# Altium PCB Lab1_Lyaptsev_pcb.pcbdoc
Units mm, origin at the board's own origin, x right, y up, seen from the top; angles counter-clockwise.
Board outline 56 x 17 mm, 4 copper layers (Top Layer, Signal Layer 1, Signal Layer 2, Bottom Layer), stack 1.522 mm thick; 24 components, 26 nets, 80 pads, 140 vias.
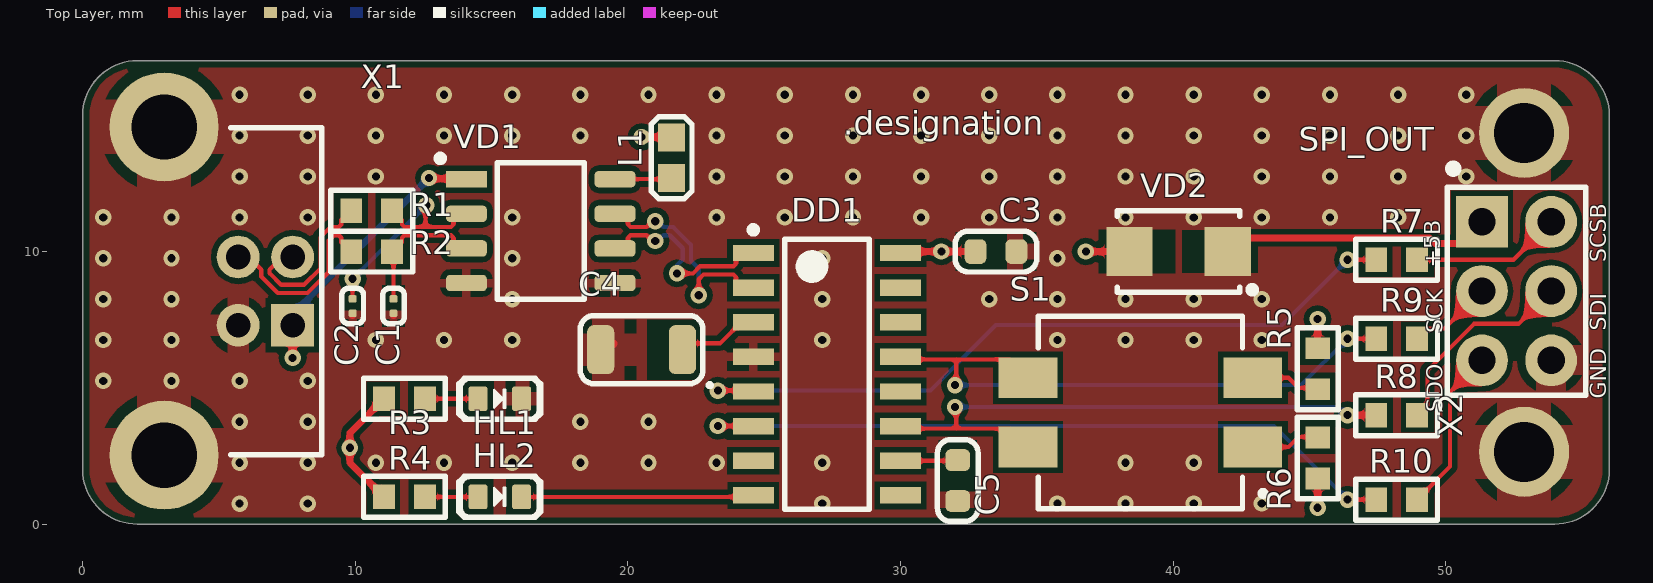
[diagram p0: Top Layer view]
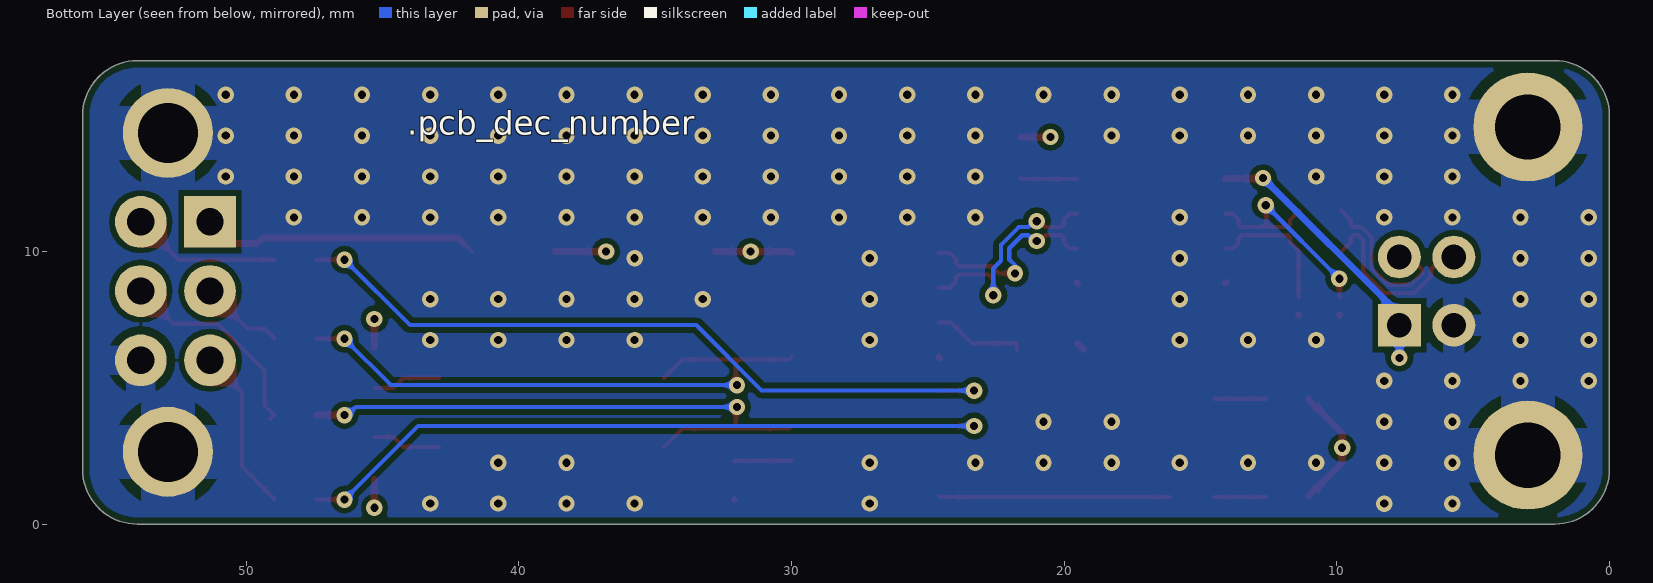
[diagram p1: Bottom Layer view, seen from below]
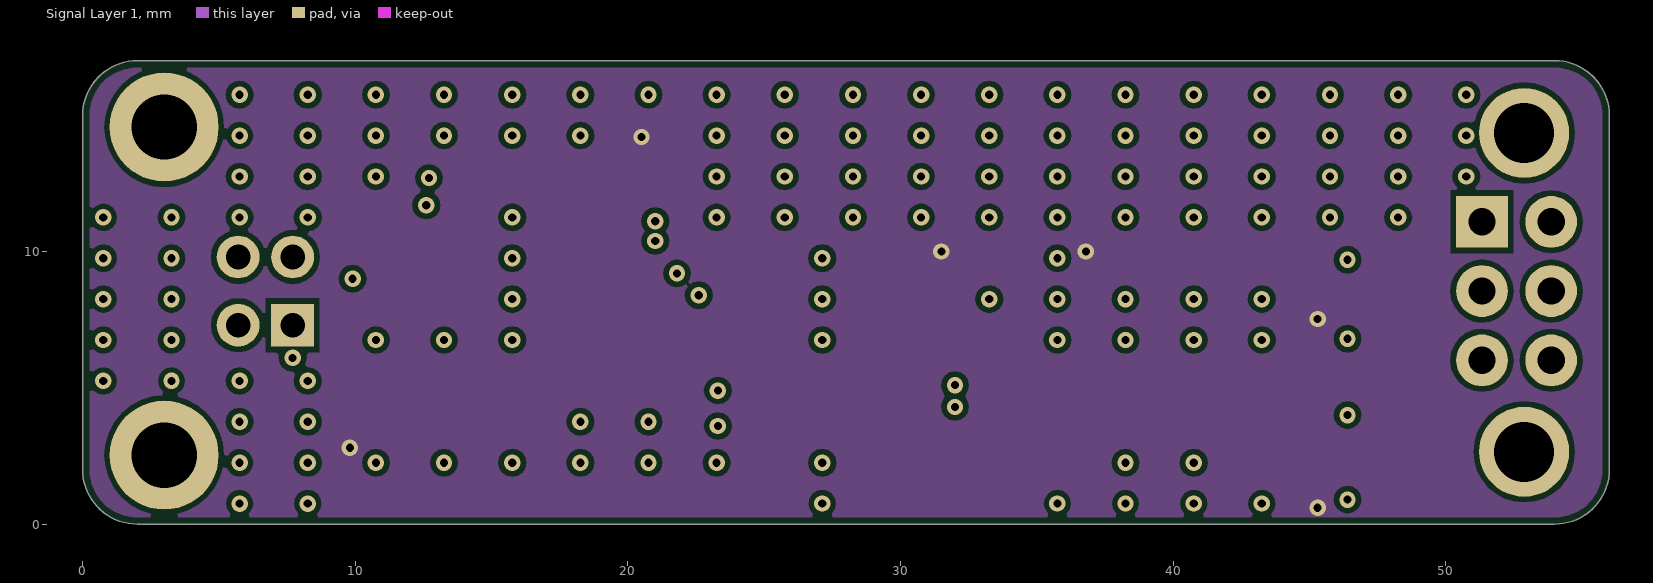
[diagram p2: Signal Layer 1]
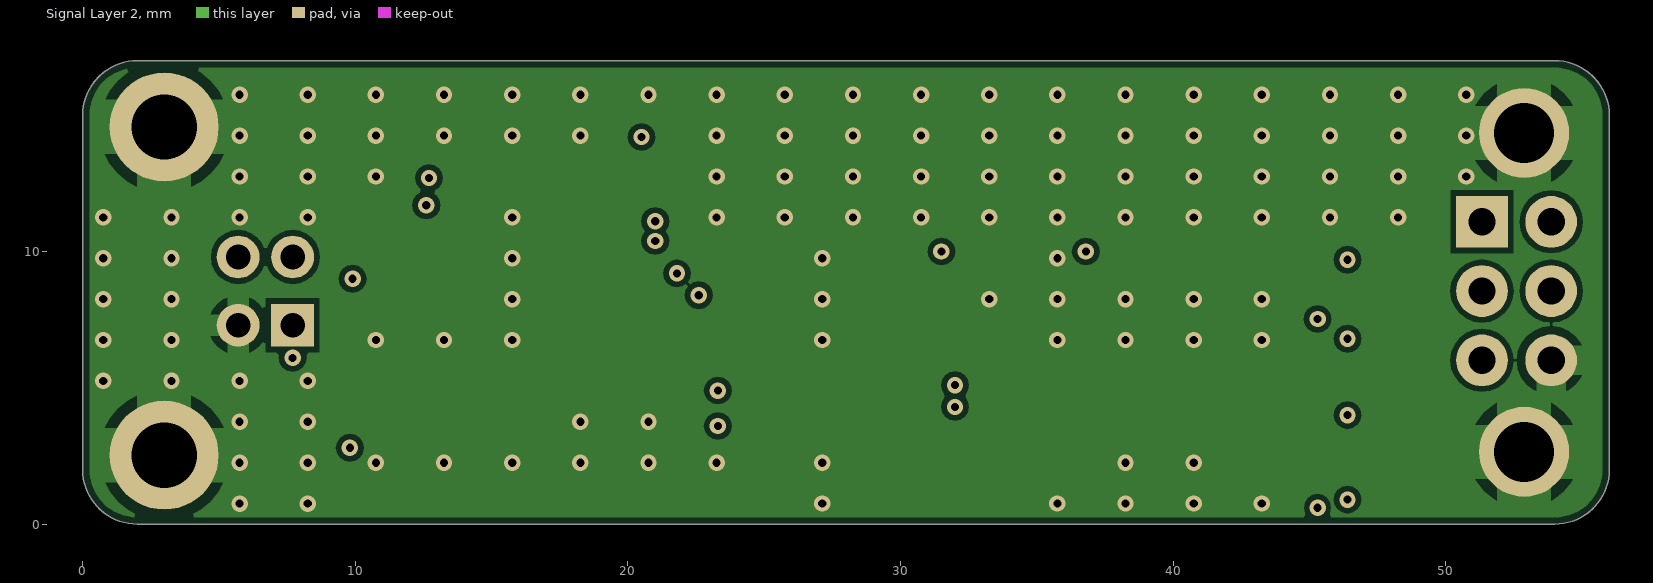
[diagram p3: Signal Layer 2]

## Layer stack, top to bottom
Top Solder: solder mask 0.0102, Solder Resist, Dk 3.5
Top Layer: signal copper 0.018
Prepreg 1: prepreg 0.125, FR4 HiTg170, Dk 5.07
Signal Layer 1: signal copper 0.018
Core 1: core 1.2, FR4, Dk 4.6
Signal Layer 2: signal copper 0.018
Prepreg 2: prepreg 0.125, FR4 HiTg170, Dk 5.07
Bottom Layer: signal copper 0.018
Bottom Solder: solder mask 0.0102, Solder Resist, Dk 3.5

## Board outline
0,2 0,15 cw(c2,15) 2,17 54,17 cw(c54,15) 56,15 56,2 cw(c54,2) 54,0 2,0 cw(c2,2)

## Design rules (kind name [scope] priority, off if disabled: settings)
AcuteAngle min_acute_angle [OnCopper] p1: minimum=3.50000000000000E+0001 checktracksonly=FALSE // Минимальный угол между примитивами топологии
BoardOutlineClearance board_outline_clearance_std [NOT (OnLayer('Bottom Overlay') OR OnLayer('Top Overlay'))] p1: gap=0.25 ignorepadtopadclearanceinfootprint=FALSE except(0: Arc-SplitContinuation Track-SplitContinuation SMDPad-SplitContinuation THPad-SplitContinuation Via-SplitContinuation Fill-SplitContinuation Poly-SplitContinuation Region-SplitContinuation Text-SplitContinuation) // Отступ элементов топологии от края фрезеруемой печатной платы
Clearance clearance_outer_18um_std [OnTopLayer OR OnBottomLayer] p1: gap=0.125 ignorepadtopadclearanceinfootprint=TRUE except(0.2: Arc-Fill Arc-Poly Track-Fill Track-Poly SMDPad-SMDPad SMDPad-Fill SMDPad-Poly THPad-Fill THPad-Poly Via-Fill Via-Poly Fill-Fill Fill-Poly Poly-Poly Poly-Region Poly-Text; 0.25: Arc-Hole Track-Hole SMDPad-Hole THPad-Hole Via-Hole Fill-Hole Poly-Hole Region-Hole Text-Hole) // Зазоры на внешних слоях
Clearance clearance_inner_18um_std [NOT (OnTopLayer Or OnBottomLayer)] p2: gap=0.125 ignorepadtopadclearanceinfootprint=FALSE except(0.2: Arc-Fill Arc-Poly Track-Fill Track-Poly SMDPad-SMDPad SMDPad-Fill SMDPad-Poly THPad-Fill THPad-Poly Via-Fill Via-Poly Fill-Fill Fill-Poly Poly-Poly Poly-Region Poly-Text; 0.25: Arc-Hole Track-Hole SMDPad-Hole THPad-Hole Via-Hole Fill-Hole Poly-Hole Region-Hole Text-Hole) // Зазоры на внутренних слоях
ComponentClearance [All] p1: gap=0 collisioncheckmode=3 verticalgap=0 showdistances=FALSE
DiffPairsRouting "Schematic Differential Pairs Routing_4" [InNet('CN_D_WITHR_P')] p1: maxlimit=0.254 minlimit=0.15 mostfreqgap=0.254 toplayer_maxgap=0.15 toplayer_prefgap=0.15 toplayer_minwidth=0.155 toplayer_maxwidth=0.155 toplayer_prefwidth=0.155 bottomlayer_maxgap=0.15 bottomlayer_prefgap=0.15 bottomlayer_minwidth=0.155 bottomlayer_maxwidth=0.155 bottomlayer_prefwidth=0.155 impedanceprofiledriven=TRUE impedanceprofileid={1B1F1868-2FFB-4D51-908A-913D90CA9AFC} impedanceprofilevalue=95.000000 maxuncoupledlength=12.7
DiffPairsRouting "Schematic Differential Pairs Routing_3" [InNet('CN_D_WITHR_N')] p2: maxlimit=0.254 minlimit=0.15 mostfreqgap=0.254 toplayer_maxgap=0.15 toplayer_prefgap=0.15 toplayer_minwidth=0.155 toplayer_maxwidth=0.155 toplayer_prefwidth=0.155 bottomlayer_maxgap=0.15 bottomlayer_prefgap=0.15 bottomlayer_minwidth=0.155 bottomlayer_maxwidth=0.155 bottomlayer_prefwidth=0.155 impedanceprofiledriven=TRUE impedanceprofileid={1B1F1868-2FFB-4D51-908A-913D90CA9AFC} impedanceprofilevalue=95.000000 maxuncoupledlength=12.7
DiffPairsRouting "Schematic Differential Pairs Routing_5" [InNet('CN_D_N')] p3: maxlimit=0.254 minlimit=0.15 mostfreqgap=0.254 toplayer_maxgap=0.15 toplayer_prefgap=0.15 toplayer_minwidth=0.155 toplayer_maxwidth=0.155 toplayer_prefwidth=0.155 bottomlayer_maxgap=0.15 bottomlayer_prefgap=0.15 bottomlayer_minwidth=0.155 bottomlayer_maxwidth=0.155 bottomlayer_prefwidth=0.155 impedanceprofiledriven=TRUE impedanceprofileid={1B1F1868-2FFB-4D51-908A-913D90CA9AFC} impedanceprofilevalue=95.000000 maxuncoupledlength=12.7
DiffPairsRouting "Schematic Differential Pairs Routing_2" [InNet('CN_D_P')] p4: maxlimit=0.254 minlimit=0.15 mostfreqgap=0.254 toplayer_maxgap=0.15 toplayer_prefgap=0.15 toplayer_minwidth=0.155 toplayer_maxwidth=0.155 toplayer_prefwidth=0.155 bottomlayer_maxgap=0.15 bottomlayer_prefgap=0.15 bottomlayer_minwidth=0.155 bottomlayer_maxwidth=0.155 bottomlayer_prefwidth=0.155 impedanceprofiledriven=TRUE impedanceprofileid={1B1F1868-2FFB-4D51-908A-913D90CA9AFC} impedanceprofilevalue=95.000000 maxuncoupledlength=12.7
DiffPairsRouting "Schematic Differential Pairs Routing_1" [InNet('USB_D_N')] p5: maxlimit=0.254 minlimit=0.15 mostfreqgap=0.254 toplayer_maxgap=0.15 toplayer_prefgap=0.15 toplayer_minwidth=0.155 toplayer_maxwidth=0.155 toplayer_prefwidth=0.155 bottomlayer_maxgap=0.15 bottomlayer_prefgap=0.15 bottomlayer_minwidth=0.155 bottomlayer_maxwidth=0.155 bottomlayer_prefwidth=0.155 impedanceprofiledriven=TRUE impedanceprofileid={1B1F1868-2FFB-4D51-908A-913D90CA9AFC} impedanceprofilevalue=95.000000 maxuncoupledlength=12.7
DiffPairsRouting "Schematic Differential Pairs Routing" [InNet('USB_D_P')] p6: maxlimit=0.254 minlimit=0.15 mostfreqgap=0.254 toplayer_maxgap=0.15 toplayer_prefgap=0.15 toplayer_minwidth=0.155 toplayer_maxwidth=0.155 toplayer_prefwidth=0.155 bottomlayer_maxgap=0.15 bottomlayer_prefgap=0.15 bottomlayer_minwidth=0.155 bottomlayer_maxwidth=0.155 bottomlayer_prefwidth=0.155 impedanceprofiledriven=TRUE impedanceprofileid={1B1F1868-2FFB-4D51-908A-913D90CA9AFC} impedanceprofilevalue=95.000000 maxuncoupledlength=12.7
DiffPairsRouting diff_pairs_routing [All] p7: maxlimit=0.254 minlimit=0.127 mostfreqgap=0.254 toplayer_maxgap=0.127 toplayer_prefgap=0.127 toplayer_minwidth=0.143 toplayer_maxwidth=0.143 toplayer_prefwidth=0.143 midlayer1_minwidth=0.381 midlayer1_maxwidth=0.381 midlayer1_prefwidth=0.381 midlayer2_minwidth=0.381 midlayer2_maxwidth=0.381 midlayer2_prefwidth=0.381 bottomlayer_maxgap=0.127 bottomlayer_prefgap=0.127 bottomlayer_minwidth=0.143 bottomlayer_maxwidth=0.143 bottomlayer_prefwidth=0.143 impedanceprofiledriven=TRUE impedanceprofileid={FD46899E-B5A2-4EF5-A302-5D2DB6A51F35} maxuncoupledlength=12.7 // Правила трассировки дифференциальных пар
HoleSize min_hole_size_std [IsPad] p1: absolutevalues=TRUE maxlimit=5.9 minlimit=0.6 maxpercent=80.000 minpercent=20.000 // Диаметр межслойного переходного отверстия
HoleSize min_hole_size_via_std [IsVia] p2: absolutevalues=TRUE maxlimit=5.9 minlimit=0.3 maxpercent=80.000 minpercent=20.000 // Минимальный диаметр монтажного отверстия
HoleToHoleClearance hole_to_hole_clearance_std [All] p1: gap=0.2 allowstackedmicrovias=FALSE // Минимальное расстояние между краями двух отверстий
MinimumAnnularRing min_via_ar_std [All] p1: minimumring=0.15 // Поясок площадки переходного отверстия (Annular ring VIA)
MinimumAnnularRing min_pad_ar_std [All] p2: minimumring=0.2 // Поясок монтажной контактной площадки (Annular ring PAD)
MinimumSolderMaskSliver min_solder_mask_bridge_std [All] p1: minsoldermaskwidth=0.15 // Мнимальная ширина масочного мостика
PlaneClearance plane_clearance_18um_std [All] p1: clearance=0.2 // Отступ полигона (для слоя plane) от элементов топологии
PlaneConnect [All] p1: planeconnectstyle=Relief reliefexpansion=0.5 reliefentries=4 reliefconductorwidth=0.2 reliefairgap=0.2
PolygonConnect poly_connect_to_pad<=0.3 [(AsMM(PadXSize_AllLayers)<=0.301) or (AsMM(PadYSize_AllLayers)<=0.301)] p1: thpad.connectstyle=Relief thpad.reliefconductorwidth=0.2 thpad.reliefentries=4 thpad.polygonreliefangle="90 Angle" thpad.airgapwidth=0.2 smdpad.connectstyle=Relief smdpad.reliefconductorwidth=0.2 smdpad.reliefentries=4 smdpad.polygonreliefangle="90 Angle" smdpad.airgapwidth=0.2 via.connectstyle=Direct via.reliefconductorwidth=0.254 via.reliefentries=4 via.polygonreliefangle="90 Angle" via.airgapwidth=0.254 // Правила подключения полигонов для падов от 0,3мм и меньше
PolygonConnect poly_connect_to_pad<=0.4 [(AsMM(PadXSize_AllLayers)<=0.401) or (AsMM(PadYSize_AllLayers)<=0.401)] p2: thpad.connectstyle=Relief thpad.reliefconductorwidth=0.26 thpad.reliefentries=4 thpad.polygonreliefangle="90 Angle" thpad.airgapwidth=0.2 smdpad.connectstyle=Relief smdpad.reliefconductorwidth=0.26 smdpad.reliefentries=4 smdpad.polygonreliefangle="90 Angle" smdpad.airgapwidth=0.2 via.connectstyle=Direct via.reliefconductorwidth=0.254 via.reliefentries=4 via.polygonreliefangle="90 Angle" via.airgapwidth=0.254 // Правила подключения полигонов для падов от 0,4 и меньше
PolygonConnect poly_connect_to_pad<=0.6 [(AsMM(PadXSize_AllLayers)<=0.601) or (AsMM(PadYSize_AllLayers)<=0.601)] p3: thpad.connectstyle=Relief thpad.reliefconductorwidth=0.33 thpad.reliefentries=4 thpad.polygonreliefangle="90 Angle" thpad.airgapwidth=0.2 smdpad.connectstyle=Relief smdpad.reliefconductorwidth=0.33 smdpad.reliefentries=4 smdpad.polygonreliefangle="90 Angle" smdpad.airgapwidth=0.2 via.connectstyle=Direct via.reliefconductorwidth=0.254 via.reliefentries=4 via.polygonreliefangle="90 Angle" via.airgapwidth=0.254 // Правила подключения полигонов для падов от 0,6мм и меньше
PolygonConnect poly_connect_to_pad<=0.7 [(AsMM(PadXSize_AllLayers)<=0.701) or (AsMM(PadYSize_AllLayers)<=0.701)] p4: thpad.connectstyle=Relief thpad.reliefconductorwidth=0.46 thpad.reliefentries=4 thpad.polygonreliefangle="90 Angle" thpad.airgapwidth=0.2 smdpad.connectstyle=Relief smdpad.reliefconductorwidth=0.46 smdpad.reliefentries=4 smdpad.polygonreliefangle="90 Angle" smdpad.airgapwidth=0.2 via.connectstyle=Direct via.reliefconductorwidth=0.254 via.reliefentries=4 via.polygonreliefangle="90 Angle" via.airgapwidth=0.254 // Правила подключения полигонов для падов от 0,7мм и меньше
PolygonConnect poly_connect_to_pad<=0.8 [(AsMM(PadXSize_AllLayers)<=0.8)or(AsMM(PadYSize_AllLayers)<=0.8)] p5: thpad.connectstyle=Relief thpad.reliefconductorwidth=0.53 thpad.reliefentries=4 thpad.polygonreliefangle="90 Angle" thpad.airgapwidth=0.3 smdpad.connectstyle=Relief smdpad.reliefconductorwidth=0.53 smdpad.reliefentries=4 smdpad.polygonreliefangle="90 Angle" smdpad.airgapwidth=0.2 via.connectstyle=Direct via.reliefconductorwidth=0.254 via.reliefentries=4 via.polygonreliefangle="90 Angle" via.airgapwidth=0.254 // Правила подключения полигонов для падов от 0,8мм и меньше
PolygonConnect poly_connect_to_pad<=1 [(AsMM(PadXSize_AllLayers)<=1.01)or(AsMM(PadYSize_AllLayers)<=1.01)] p6: thpad.connectstyle=Relief thpad.reliefconductorwidth=0.6 thpad.reliefentries=4 thpad.polygonreliefangle="90 Angle" thpad.airgapwidth=0.3 smdpad.connectstyle=Relief smdpad.reliefconductorwidth=0.6 smdpad.reliefentries=4 smdpad.polygonreliefangle="90 Angle" smdpad.airgapwidth=0.2 via.connectstyle=Direct via.reliefconductorwidth=0.254 via.reliefentries=4 via.polygonreliefangle="90 Angle" via.airgapwidth=0.254 // Правила подключения полигонов для падов от 1мм и меньше
PolygonConnect poly_connect_to_pad<=1.3 [(AsMM(PadXSize_AllLayers)<=1.31)or(AsMM(PadYSize_AllLayers)<=1.31)] p7: thpad.connectstyle=Relief thpad.reliefconductorwidth=0.66 thpad.reliefentries=4 thpad.polygonreliefangle="90 Angle" thpad.airgapwidth=0.3 smdpad.connectstyle=Relief smdpad.reliefconductorwidth=0.86 smdpad.reliefentries=4 smdpad.polygonreliefangle="90 Angle" smdpad.airgapwidth=0.2 via.connectstyle=Direct via.reliefconductorwidth=0.254 via.reliefentries=4 via.polygonreliefangle="90 Angle" via.airgapwidth=0.254 // Правила подключения полигонов для падов от 1,3мм и меньше
PolygonConnect poly_connect_to_pad<=1.6 [(AsMM(PadXSize_AllLayers)<=1.61)or(AsMM(PadYSize_AllLayers)<=1.61)] p8: thpad.connectstyle=Relief thpad.reliefconductorwidth=0.8 thpad.reliefentries=4 thpad.polygonreliefangle="90 Angle" thpad.airgapwidth=0.3 smdpad.connectstyle=Relief smdpad.reliefconductorwidth=1 smdpad.reliefentries=4 smdpad.polygonreliefangle="90 Angle" smdpad.airgapwidth=0.2 via.connectstyle=Direct via.reliefconductorwidth=0.254 via.reliefentries=4 via.polygonreliefangle="90 Angle" via.airgapwidth=0.254 // Правила подключения полигонов для падов от 1,6мм и меньше
PolygonConnect poly_connect_to_pad<=1.8 [(AsMM(PadXSize_AllLayers)<=1.8)or(AsMM(PadYSize_AllLayers)<=1.8)] p9: thpad.connectstyle=Relief thpad.reliefconductorwidth=1 thpad.reliefentries=4 thpad.polygonreliefangle="90 Angle" thpad.airgapwidth=0.3 smdpad.connectstyle=Relief smdpad.reliefconductorwidth=1.2 smdpad.reliefentries=4 smdpad.polygonreliefangle="90 Angle" smdpad.airgapwidth=0.2 via.connectstyle=Direct via.reliefconductorwidth=0.254 via.reliefentries=4 via.polygonreliefangle="90 Angle" via.airgapwidth=0.254 // Правила подключения полигонов для падов от 1,8мм и меньше
PolygonConnect poly_connect_to_pad<=2 [(AsMM(PadXSize_AllLayers)<=2.01)or(AsMM(PadYSize_AllLayers)<=2.01)] p10: thpad.connectstyle=Relief thpad.reliefconductorwidth=1.1 thpad.reliefentries=4 thpad.polygonreliefangle="90 Angle" thpad.airgapwidth=0.3 smdpad.connectstyle=Relief smdpad.reliefconductorwidth=1.4 smdpad.reliefentries=4 smdpad.polygonreliefangle="90 Angle" smdpad.airgapwidth=0.2 via.connectstyle=Direct via.reliefconductorwidth=0.254 via.reliefentries=4 via.polygonreliefangle="90 Angle" via.airgapwidth=0.254 // Правила подключения полигонов для падов от 2мм и меньше
PolygonConnect poly_connect_to_pad<=2.3 [(AsMM(PadXSize_AllLayers)<=2.31)or(AsMM(PadYSize_AllLayers)<=2.31)] p11: thpad.connectstyle=Relief thpad.reliefconductorwidth=1.2 thpad.reliefentries=4 thpad.polygonreliefangle="90 Angle" thpad.airgapwidth=0.3 smdpad.connectstyle=Relief smdpad.reliefconductorwidth=1.4 smdpad.reliefentries=4 smdpad.polygonreliefangle="90 Angle" smdpad.airgapwidth=0.2 via.connectstyle=Direct via.reliefconductorwidth=0.254 via.reliefentries=4 via.polygonreliefangle="90 Angle" via.airgapwidth=0.254 // Правила подключения полигонов для падов от 2,3мм и меньше
PolygonConnect poly_connect_to_pad<=2.5 [(AsMM(PadXSize_AllLayers)<=2.51)or(AsMM(PadYSize_AllLayers)<=2.51)] p12: thpad.connectstyle=Relief thpad.reliefconductorwidth=1.2 thpad.reliefentries=4 thpad.polygonreliefangle="90 Angle" thpad.airgapwidth=0.3 smdpad.connectstyle=Relief smdpad.reliefconductorwidth=1.4 smdpad.reliefentries=4 smdpad.polygonreliefangle="90 Angle" smdpad.airgapwidth=0.2 via.connectstyle=Direct via.reliefconductorwidth=0.254 via.reliefentries=4 via.polygonreliefangle="90 Angle" via.airgapwidth=0.254 // Правила подключения полигонов для падов от 2,5мм и меньше
PolygonConnect poly_connect_to_pad<=2.7 [(AsMM(PadXSize_AllLayers)<=2.71)or(AsMM(PadYSize_AllLayers)<=2.71)] p13: thpad.connectstyle=Relief thpad.reliefconductorwidth=1.4 thpad.reliefentries=4 thpad.polygonreliefangle="90 Angle" thpad.airgapwidth=0.3 smdpad.connectstyle=Relief smdpad.reliefconductorwidth=1.6 smdpad.reliefentries=4 smdpad.polygonreliefangle="90 Angle" smdpad.airgapwidth=0.2 via.connectstyle=Direct via.reliefconductorwidth=0.254 via.reliefentries=4 via.polygonreliefangle="90 Angle" via.airgapwidth=0.254 // Правила подключения полигонов для падов от 2,7мм и меньше
PolygonConnect poly_connect_to_pad<=3 [(AsMM(PadXSize_AllLayers)<=3.01)or(AsMM(PadYSize_AllLayers)<=3.01)] p14: thpad.connectstyle=Relief thpad.reliefconductorwidth=1.6 thpad.reliefentries=4 thpad.polygonreliefangle="90 Angle" thpad.airgapwidth=0.3 smdpad.connectstyle=Relief smdpad.reliefconductorwidth=1.8 smdpad.reliefentries=4 smdpad.polygonreliefangle="90 Angle" smdpad.airgapwidth=0.2 via.connectstyle=Direct via.reliefconductorwidth=0.254 via.reliefentries=4 via.polygonreliefangle="90 Angle" via.airgapwidth=0.254 // Правила подключения полигонов для падов от 3мм и меньше
PolygonConnect poly_connect_to_pad<=7 [(AsMM(PadXSize_AllLayers)<7.01)or(AsMM(PadYSize_AllLayers)<=7.01)] p15: thpad.connectstyle=Relief thpad.reliefconductorwidth=2 thpad.reliefentries=4 thpad.polygonreliefangle="90 Angle" thpad.airgapwidth=0.4 smdpad.connectstyle=Relief smdpad.reliefconductorwidth=2 smdpad.reliefentries=4 smdpad.polygonreliefangle="90 Angle" smdpad.airgapwidth=0.3 via.connectstyle=Direct via.reliefconductorwidth=0.254 via.reliefentries=4 via.polygonreliefangle="90 Angle" via.airgapwidth=0.254 // Правила подключения полигонов для падов от 7мм и меньше
PolygonConnect poly_connect_to_pad [All] p16: thpad.connectstyle=Relief thpad.reliefconductorwidth=0.25 thpad.reliefentries=4 thpad.polygonreliefangle="90 Angle" thpad.airgapwidth=0.2 smdpad.connectstyle=Relief smdpad.reliefconductorwidth=0.25 smdpad.reliefentries=4 smdpad.polygonreliefangle="90 Angle" smdpad.airgapwidth=0.2 via.connectstyle=Direct via.reliefconductorwidth=0.25 via.reliefentries=4 via.polygonreliefangle="90 Angle" via.airgapwidth=0.2 // Правила подключения полигонов общие
RoutingCorners [All] p1 off: cornerstyle=45-Degree minsetback=2.5 maxsetback=2.5
RoutingVias [All] p1: holewidth=0.3 width=0.6 viastyle="Through Hole" minholewidth=0.3 minwidth=0.6 maxholewidth=5.9 maxwidth=6.4
SilkToSilkClearance silk_to_silk_clearance_std [All] p1 off: silktosilkclearance=0.15 // Отступ текста шелкографии от других примитивов шелкографии
SilkToSolderMaskClearance silk_to_solder_mask_clearance_std [IsPad] p1 off: minsilkscreentomaskgap=0.15 clearancetoexposedcopper=FALSE // Минимальное расстояние между элементами шелкографии и вскрытой медью
SolderMaskExpansion solder_mask_expansion_std [All] p1: expansion=0.05 // Припуск паяльной масски
UnRoutedNet [All] p1: checkbadconnections=TRUE
Width width_18um_std [All] p1: maxlimit=10 minlimit=0.125 preferedwidth=0.15 checkconnectedcopper=TRUE // Ширина проводников (общая)
19 further rules are at their usual default settings.

## Classes and differential pairs
differential pair class USB_SIGNALS: CN_D CN_D_WITHR USB_D
differential pair CN_D_WITHR: +CN_D_WITHR_P -CN_D_WITHR_N
differential pair USB_D: +USB_D_P -USB_D_N
differential pair CN_D: +CN_D_P -CN_D_N

## Components (designator, comment, footprint, x,y, rotation, side; value= is the part's Value field where it differs from the comment)
C1 "47" C0201 11.4,8 r270 top
C2 "47" C0201 9.9,8 r270 top
C3 "0,1 мк" C0603 33.5,10 r0 top
C4 "1 мк" C1206POLAR 20.5,6.4 r180 top
C5 "0,1 мк" C0603 32.1,1.6 r270 top
DD1 "HT42B533-1" SOP-16 27.3,5.5 r0 top
HL1 "TLMS1000-GS08" HL0603 15.3,4.6 r180 top
HL2 "TLMB1100-GS08" HL0603 15.3,1 r180 top
L1 "BLM18PG221SN1D" BLM-2-0603 21.6,13.44 r90 top
R1 "33" R0603 10.6,11.5 r0 top
R2 "33" R0603 10.6,10 r0 top
R3 "220" R0603 11.8,4.6 r180 top
R4 "330" R0603 11.8,1 r0 top
R5 "10 к" R0603 45.3,5.7 r90 top
R6 "10 к" R0603 45.3,2.425 r270 top
R7 "100" R0603 48.2,9.7 r0 top
R8 "100" R0603 48.2,4 r0 top
R9 "100" R0603 48.2,6.8 r0 top
R10 "100" R0603 48.2,0.9 r0 top
S1 "SDA02H1SBD" SDA02H1SBD 38.8,4.1 r180 top
VD1 "USB6B1" SOIC-8 16.8,10.75 r0 top
VD2 "SL13-E3/5AT" DO-214AC 40.2,10 r180 top
X1 "DS1099-WN0" DS1099-WN0 0.9,8.55 r270 top
X2 "DS1021-2*3SF11" DS1021-2X3SF11 52.6,8.55 r270 top

## Footprints (in the part's own frame and the unit in brackets; to place one, negate y for a bottom-side part, rotate by r counter-clockwise, add the part's x,y. Pads: shape width x height; smd on the part's side, far side on the other; paste and mask are expansions set on the pad)
BLM-2-0603 [mm] "Chip Inductor, 2-Leads, Body 1,60x0,80mm, IPC Medium Density"
  rect 1.02x0.98 smd: 1(-0.74,0) 2(0.74,0)
  silkscreen extent -1.5,-0.75 1.5,0.75, body extent -0.8,-0.37 0.8,0.38, height 0.8
C0201 [mm] "Chip Capacitor, 2-Leads, Body 0,60x0,30mm, IPC Medium Density"
  rrect50% 0.28x0.3 smd: 1(-0.265,0) 2(0.265,0)
  silkscreen extent -0.65,-0.4 0.65,0.4, body extent -0.3,-0.15 0.3,0.15, height 0.29
C0603 [mm] "Chip Capacitor, 2-Leads, Body 1,60x0,80mm, IPC Medium Density"
  rrect50% 0.8x0.9 smd: 1(-0.75,0) 2(0.75,0)
  silkscreen extent -1.5,-0.75 1.5,0.75, body extent -0.8,-0.4 0.8,0.4, height 0.8
C1206POLAR [mm] "Chip Capacitor, 2-Leads, Body 3,20x1,60mm, IPC Medium Density"
  rrect50% 1x1.8 smd: 1(-1.5,0) 2(1.5,0)
  silkscreen extent -2.55,-1.25 2.25,1.35, body extent -1.73,-0.8 1.73,0.8, height 1.65
DO-214AC [mm] "Molded Diode, 2-Leads, Body 4,25x2,67mm, IPC Medium Density"
  rect 1.7x1.8 smd: 1(-1.8,0) 2(1.8,0)
  silkscreen extent -2.83,-1.5 2.25,1.52, body extent -2.55,-1.3 2.55,1.3, height 2.26
DS1021-2X3SF11 [mm]
  rect 1.9x1.9 hole 1: 1(-2.54,-1.27)
  round 1.9 hole 1: 2(-2.54,1.27) 3(0,-1.27) 6(2.54,1.27)
  round 1.9 hole 1 mask+0.102: 4(0,1.27) 5(2.54,-1.27)
  silkscreen extent -4.5,-2.55 3.81,2.54, body extent -3.81,-2.54 3.81,2.54, height 8.59
DS1099-WN0 [mm]
  rect 1.57x1.57 hole 0.9: 1(1.25,6.8)
  round 1.57 hole 0.9: 2(-1.25,6.8) 3(-1.25,4.8) 4(1.25,4.8)
  round 4 hole 2.4: TP1(-6.02,2.088) TP1(6.02,2.088)
  silkscreen extent -5.99,4.54 6.01,7.86, body extent -7.4,-8.28 7.4,8.22, height 11
HL0603 [mm] "Chip Resistor, 2-Leads, Body 1,60x0,80mm, IPC Medium Density"
  rrect25% 0.7x0.9 smd: 1(-0.8,0) 2(0.8,0)
  silkscreen extent -1.5,-0.75 1.5,0.75, body extent -0.81,-0.4 0.81,0.4, height 0.64
R0603 [mm] "Chip Resistor, 2-Leads, Body 1,60x0,80mm, IPC Medium Density"
  rect 0.8x0.9 smd: 1(-0.75,0) 2(0.75,0)
  silkscreen extent -1.5,-0.75 1.5,0.75, body extent -0.77,-0.43 0.78,0.43, height 0.43
SDA02H1SBD [mm]
  rect 2.15x1.5 smd: 1(-4.125,-1.27) 2(4.125,-1.27) 3(-4.125,1.27) 4(4.125,1.27)
  silkscreen extent -4.6,-3.53 3.74,3.53, body extent -4.65,-3.53 4.65,3.53, height 5.44
SOIC-8 [mm] "SOIC, 8-Leads, Body 4,90x3,90mm, Pitch 1,27mm, IPC Medium Density"
  rect 1.5x0.6 smd: 1(-2.725,1.905)
  rrect50% 1.5x0.6 smd: 2(-2.725,0.635) 3(-2.725,-0.635) 4(-2.725,-1.905) 5(2.725,-1.905) 6(2.725,-0.635) 7(2.725,0.635) 8(2.725,1.905)
  silkscreen extent -3.81,-2.5 1.6,2.79, body extent -3.06,-2.47 3.06,2.48, height 1.75
SOP-16 [mm] "SOP, 16-Leads, Body 9,90x3,90mm, Pitch 1,27mm, IPC Medium Density"
  rect 1.5x0.6 smd: 1(-2.7,4.445) 2(-2.7,3.175) 3(-2.7,1.905) 4(-2.7,0.635) 5(-2.7,-0.635) 6(-2.7,-1.905) 7(-2.7,-3.175) 8(-2.7,-4.445) 9(2.7,-4.445) 10(2.7,-3.175) 11(2.7,-1.905) 12(2.7,-0.635) 13(2.7,0.635) 14(2.7,1.905) 15(2.7,3.175) 16(2.7,4.445)
  silkscreen extent -2.82,-4.95 1.55,5.42, body extent -3.12,-4.99 3.12,4.99, height 1.58

## Part data
C1 C2: library part c0003, "=Описание", HelpURL=http://product.samsungsem.com/mlcc/CL03C470JA3NNN.do, ID=c0003, Корпус=0201, Наименование=CL03C470JA3NNNC, Напряжение="25 В", Номинал=47, Номинальное напряжение="25 В", Описание="Конденсатор чип 0201 47 пФ 25 В ±5 %", Отклонение="±5 %", Производитель="Samsung Electro-Mechanics", Рабочие температуры="от –55 °С до +125 °С", Температурный коэффициент емкости=C0G, Фамилия=Козлов
C3 C5: library part c0060, "=Описание", HelpURL=https://www.yageo.com/upload/media/product/productsearch/datasheet/mlcc/UPY-GPHC_X7R_6.3V-to-50V_20.pdf, ID=c0060, Корпус=0603, Наименование=CC0603JRX7R9BB104, Напряжение="50 В", Номинал="0,1 мк", Номинальное напряжение="50 В", Описание="Конденсатор чип 0603 100 нФ 50 В ±5 %", Отклонение="±5 %", Производитель="YAGEO Corp.", Рабочие температуры="от –55 °С до +125 °С", Температурный коэффициент емкости=X7R, Фамилия=Ларионов
C4: library part c0150, "=Описание", HelpURL=https://www.vishay.com/capacitors/list/product-40002/, ID=c0150, Корпус=1206, Наименование=293D105X9025A2TE3, Напряжение="25 В", Номинал="1 мк", Номинальное напряжение="25 В", Описание="Конденсатор чип 1206 1 мкФ 25 В ±10 % полярный", Отклонение="±10 %", Производитель="Vishay Intertechnology, Inc.", Рабочие температуры="от –55 °С до +125 °С", Температурный коэффициент емкости=—, Фамилия=Ларионов
DD1: library part dd0012, "=Описание", HelpURL=https://www.holtek.com/productdetail/-/vg/42B533-x, ID=dd0012, Корпус=NSOP-16, Наименование=HT42B533-1, Описание="Преобразователь USB-SPI", Производитель="Holtek Semiconductor Inc.", Фамилия=Козлов
HL1: library part hl0001, "=Описание", Colour=Красный, HelpURL=https://www.vishay.com/leds/list/product-83172/, ID=hl0001, Корпус=0603, Наименование=TLMS1000-GS08, Номинальная длина волны="628 нм", Номинальная сила света="4 мкд", Номинальное падение напряжения="1,8 В", Номинальный прямой ток="15 мА", Описание="Светодиод чип 0603 красный", Производитель="Vishay Intertechnology, Inc.", Рабочие температуры="от –40 °С до +100 °С", Рассеиваемая мощность="40 мВт", Фамилия=Ларионов, Цвет=Красный
HL2: library part hl0006, "=Описание", Colour=Синий, HelpURL=https://www.vishay.com/leds/list/product-83173/, ID=hl0006, Корпус=0603, Наименование=TLMB1100-GS08, Номинальная длина волны="466 нм", Номинальная сила света="5 мкд", Номинальное падение напряжения="3,9 В", Номинальный прямой ток="30 мА", Описание="Светодиод чип 0603 синий", Примечание="Not for new design", Производитель="Vishay Intertechnology, Inc.", Рабочие температуры="от –40 °С до +100 °С", Рассеиваемая мощность="90 мВт", Фамилия=Ларионов, Цвет=Синий
L1: library part l0002, "=Описание", HelpURL=https://www.murata.com/en-global/products/productdetail?partno=BLM18PG221SN1%23, ID=l0002, Корпус=0603, Наименование=BLM18PG221SN1D, Описание="Ферритовая бусина 220 Ом ±25 %", Отклонение, 100 МГц="±25 %", Производитель="Murata Manufacturing Co., Ltd.", Рабочие температуры="от –55 °С до +125 °С", Сопротивление, 100 МГц="220 Ом", Сопротивление при постоянном токе="0,1 Ом", Фамилия=Самарин
R1 R2 R7 R8 R9 R10: library part r0004, "=Описание", ID=r0004, Корпус=0603, Номинальное напряжение="75 В", Номинальный ток="1 А", Отклонение="±1 %", Производитель=Yageo, Рабочие температуры="от -55 °С до +155 °С"
  R1 R2: HelpURL=https://www.yageo.com/upload/media/product/productsearch/datasheet/rchip/PYu-AA_51_RoHS_L_3.pdf, Наименование=AA0201FR-0733RL, Номинал=33, Описание="Резистор чип 0603 33 Ом ±1 % 0,1 Вт", Фамилия=Козлов
  R7 R8 R9 R10: HelpURL=https://www.yageo.com/upload/media/product/productsearch/datasheet/rchip/PYu-RC_Group_51_RoHS_L_11.pdf, Наименование=RC0603FR??07100RL, Номинал=100, Описание="Резистор чип 0603 100 Ом ±1 % 0,1 Вт", Фамилия=Самарин
R3: library part r0005, "=Описание", HelpURL=https://www.yageo.com/upload/media/product/productsearch/datasheet/rchip/PYu-RC_Group_51_RoHS_L_11.pdf, ID=r0005, Корпус=0603, Наименование=RC0603FR-07220RL, Номинал=220, Номинальное напряжение="75 В", Номинальный ток="1 А", Описание="Резистор чип 0603 220 Ом ±1 % 0,1 Вт", Отклонение="±1 %", Производитель=Yageo, Рабочие температуры="от -55 °С до +155 °С", Фамилия=Ларионов
R4: library part r0006, "=Описание", HelpURL=https://www.yageo.com/upload/media/product/productsearch/datasheet/rchip/PYu-RC_Group_51_RoHS_L_11.pdf, ID=r0006, Корпус=0603, Наименование=RC0603FR-07330RL, Номинал=330, Номинальное напряжение="75 В", Номинальный ток="1 А", Описание="Резистор чип 0603 330 Ом ±1 % 0,1 Вт", Отклонение="±1 %", Производитель=Yageo, Рабочие температуры="от -55 °С до +155 °С", Фамилия=Ларионов
R5 R6: library part r0010, "=Описание", HelpURL=https://www.yageo.com/upload/media/product/productsearch/datasheet/rchip/PYu-RC_Group_51_RoHS_L_11.pdf, ID=r0010, Корпус=0603, Наименование=RC0603FR-0710KL, Номинал="10 к", Номинальное напряжение="75 В", Номинальный ток="1 А", Описание="Резистор чип 0603 10 кОм ±1 % 0,1 Вт", Отклонение="±1 %", Производитель=Yageo, Рабочие температуры="от -55 °С до +155 °С", Фамилия=Самарин
S1: library part s0006, "=Описание", HelpURL=https://www.ckswitches.com/products/switches/product-details/DIP/SDA/SDA02H1SBD/, ID=s0006, Количество контактов=4, Корпус="7,06 х 9,30 х 5,45", Наименование=SDA02H1SBD, Описание="2-х позиционный движковый переключатель", Производитель=C&K, Промывка=Запрещена, Рабочие температуры="от –40 °С до +85 °С", Сопротивление контакта="50 мОм", Ток нагрузки="100 мА @ 5 В", Фамилия=Козлов
VD1: library part vd0010, "=Описание", HelpURL=https://www.st.com/content/st_com/en/products/protection-devices/esd-protection/usb-port-protection/usb6b1.html, ID=vd0010, Корпус=SOIC-8, Наименование=USB6B1, Описание="Диодная сборка для подавления помех, от 6 В", Производитель=STMicroelectronics, Фамилия=Ларионов
VD2: library part vd0003, "=Описание", HelpURL=https://www.vishay.com/product?docid=88740, ID=vd0003, Корпус=DO-214AC, Максимальное обратное напряжение="30 В", Максимальное прямое напряжение="0,445 В", Максимальный прямой ток="1,5 А", Наименование=SL13-E3/5AT, Описание="Диод Шоттки 30 В 1,5 А", Производитель="Vishay Intertechnology, Inc.", Рабочие температуры="от –55 °С до +125 °С", Фамилия=Ларионов
X1: library part x0005, "=Описание", Contact_1="+5 В", Contact_2=D-, Contact_3=D+, Contact_4=GND, HelpURL=http://www.connfly.com/productshow.aspx?id=407, ID=x0005, Наименование=DS1099-WN0, Описание="USB Type B гнездо", Производитель="Connfly Electronic Co. LTD", Фамилия=Самарин
X2: library part x0003, Contact_1=+5V, Contact_2=SCSB, Contact_3=SCK, Contact_4=SDI, Contact_5=SDO, Contact_6=GND, HelpURL=http://www.connfly.com/productshow.aspx?id=118, ID=x0003, Наименование=DS1021-2*3SF11, Описание="PLS 3x2 pin 2,54 мм прямой", Производитель="Connfly Electronic Co. LTD", Фамилия=Самарин

## Free pads (board coordinates)
  round 3.3 hole 2.2: 1(52.88,2.655) 1(52.88,14.355)

## Via types
v1: diameter 0.6, hole 0.3, Top Layer to Bottom Layer, tented both sides, 135 vias
v2: diameter 0.6, hole 0.3, Top Layer to Bottom Layer, tented bottom, 5 vias

## Nets (pads, with @x,y where several pads share a name; then routed paths per layer and width w, separated by ;. In a path a pad name is that pad's centre, name@x,y a point inside that pad or via, vN(x,y) a via of type N, cw(c..) or ccw(c..) an arc to the next point about the centre after c; other vN are vias at no path point)
+5V: C3.1 DD1.16 L1.2 R3.2 R4.1 R5.2 R6.2 VD2.2 | length 12.5
  Top Layer w0.25: R4.1@11.025,1.025 9.8,2.25 v1(9.8,2.8) 9.8,3.35 11.025,4.575 R3.2@11.025,4.6 ; v1(20.5,14.2) 21.58,14.2 L1.2 ; DD1.16 30.055,10 v1(31.5,10) C3.1@32.8,10 ; v1(36.8,10) VD2.2@38.675,10 ; v1(45.3,0.6) R6.2@45.3,1.65 ; R5.2@45.3,6.475 v1(45.3,7.525)
CN_5V_IN: VD1.1 X1.1 | length 11.3
  Top Layer w0.25: v1(7.7,6.1) X1.1 ; v1(12.7,12.7) 12.722,12.677 14.052,12.677 VD1.1
  Bottom Layer w0.25: v1(7.7,6.1) X1.1 7.7,7.7 v1(12.7,12.7)
CN_D_N: R1.1 X1.2 | length 6.2
  Top Layer w0.155: X1.2 7.317,9.8 6.945,9.428 6.943,9.428 6.853,9.337 6.853,9.208 7.278,8.782 8.122,8.782 8.718,9.378 8.718,10.528 9.092,10.903 9.392,10.903 9.483,10.993 9.483,11.158 R1.1@9.825,11.5
CN_D_P: R2.1 X1.3 | length 6.7
  Top Layer w0.155: X1.3 6.083,9.8 6.455,9.428 6.457,9.428 6.547,9.337 6.547,9.082 7.152,8.477 8.248,8.477 9.023,9.252 9.023,10.402 9.218,10.597 9.392,10.597 9.483,10.507 9.483,10.342 R2.1@9.825,10
CN_D_WITHR_N: C2.1 R1.2 VD1.2 | length 8.7
  Top Layer w0.155: C2.1@9.9,8.31 v1(9.9,9) ; R1.2@11.375,11.5 11.717,11.158 11.717,10.993 11.808,10.903 12.572,10.903 ; v1(12.6,11.7) 12.572,11.672 12.572,10.903 ; VD1.2 13.804,11.385 13.599,11.179 13.599,10.993 13.508,10.903 12.572,10.903
  Bottom Layer w0.155: v1(9.9,9) v1(12.6,11.7)
CN_D_WITHR_P: C1.1 R2.2 VD1.3 | length 5.1
  Top Layer w0.155: C1.1@11.4,8.31 11.4,9.975 11.375,10 11.717,10.342 11.717,10.507 11.808,10.597 12.699,10.597 13.508,10.597 13.599,10.507 13.599,10.321 13.804,10.115 VD1.3
CN_SCK: R9.2 X2.3 | length 3.1
  Top Layer w0.155: R9.2@48.975,6.8 48.975,6.825 49.322,7.172 49.952,7.172 X2.3
CN_SCSB: R7.2 X2.2 | length 5.5
  Top Layer w0.15: R7.2@48.975,9.7 52.48,9.7 X2.2
CN_SDI: R8.2 X2.4 | length 7.7
  Top Layer w0.15: R8.2@49.125,3.85 48.975,4 49.325,4.35 49.325,5.631 51.044,7.351 52.671,7.351 X2.4
CN_SDO: R10.2 X2.5 | length 6.1
  Top Layer w0.15: R10.2@48.975,0.9 48.975,0.925 50.16,2.11 50.16,4.84 X2.5
GND: C1.2 C2.2 C3.2 C4.2 C5.2 DD1.4 HL1.1 pad.1 VD1.4 VD1.5 X1.4 X1.TP1 X2.6 | length 0.5
  Top Layer w0.25: C2.2@9.9,7.65 C2.2@9.9,7.69 ; C1.2@11.4,7.65 C1.2@11.4,7.69 ; VD1.4@14.047,8.872 VD1.4 ; C4.2@19.275,6.4 19.5,6.625 ; VD1.5@19.5,8.82 VD1.5@19.525,8.845 ; DD1.4@24.565,6.1 DD1.4
  other v1: 5.755,0.755 8.255,0.755 35.755,0.755 38.255,0.755 40.755,0.755 43.255,0.755 5.755,2.255 8.255,2.255 10.755,2.255 13.255,2.255 15.755,2.255 18.255,2.255 20.755,2.255 23.255,2.255 38.255,2.255 40.755,2.255 5.755,3.755 8.255,3.755 18.255,3.755 20.755,3.755 0.755,5.255 3.255,5.255 5.755,5.255 8.255,5.255 0.755,6.755 3.255,6.755 10.755,6.755 13.255,6.755 15.755,6.755 35.755,6.755 38.255,6.755 40.755,6.755 43.255,6.755 0.755,8.255 3.255,8.255 15.755,8.255 33.255,8.255 35.755,8.255 38.255,8.255 40.755,8.255 43.255,8.255 0.755,9.755 3.255,9.755 15.755,9.755 35.755,9.755 0.755,11.255 3.255,11.255 5.755,11.255 8.255,11.255 15.755,11.255 23.255,11.255 25.755,11.255 28.255,11.255 30.755,11.255 33.255,11.255 35.755,11.255 38.255,11.255 40.755,11.255 43.255,11.255 45.755,11.255 48.255,11.255 5.755,12.755 8.255,12.755 10.755,12.755 23.255,12.755 25.755,12.755 28.255,12.755 30.755,12.755 33.255,12.755 35.755,12.755 38.255,12.755 40.755,12.755 43.255,12.755 45.755,12.755 48.255,12.755 50.755,12.755 5.755,14.255 8.255,14.255 10.755,14.255 13.255,14.255 15.755,14.255 18.255,14.255 23.255,14.255 25.755,14.255 28.255,14.255 30.755,14.255 33.255,14.255 35.755,14.255 38.255,14.255 40.755,14.255 43.255,14.255 45.755,14.255 48.255,14.255 50.755,14.255 5.755,15.755 8.255,15.755 10.755,15.755 13.255,15.755 15.755,15.755 18.255,15.755 20.755,15.755 23.255,15.755 25.755,15.755 28.255,15.755 30.755,15.755 33.255,15.755 35.755,15.755 38.255,15.755 40.755,15.755 43.255,15.755 45.755,15.755 48.255,15.755 50.755,15.755
  other v2: 27.13,0.755 27.13,2.255 27.13,6.755 27.13,8.255 27.13,9.755
NetC4_1: C4.1 DD1.3 | length 3.4
  Top Layer w0.15: C4.1@21.725,6.4 21.725,6.635 23.38,6.635 24.15,7.405 DD1.3
NetC5_1: C5.1 DD1.10 | length 2.1
  Top Layer w0.15: DD1.10 32.075,2.325 C5.1@32.1,2.3
NetHL1_2: HL1.2 R3.1 | length 1.9
  Top Layer w0.15: R3.1@12.575,4.6 HL1.2@14.475,4.6
NetHL2_2: HL2.2 R4.2 | length 1.9
  Top Layer w0.15: R4.2@12.575,1 HL2.2@14.475,1
NetL1_1: L1.1 VD1.8 | length 2.1
  Top Layer w0.15: VD1.8@19.525,12.655 21.555,12.655 L1.1
NetR5_1: R5.1 S1.1 | length 2.5
  Top Layer w0.15: S1.1 44.23,5.37 44.6,5 R5.1@45.3,5
NetR6_1: R6.1 S1.3 | length 2.5
  Top Layer w0.15: S1.3 44.23,2.83 44.6,3.2 R6.1@45.3,3.2
NetVD2_1: VD2.1 X2.1 | length 10.2
  Top Layer w0.15: VD2.1@41.725,10 VD2.1@42.025,10.3 ; X2.1@50.54,10.3 X2.1
  Top Layer w0.25: VD2.1@42.025,10.3 42.225,10.5 49.404,10.5 49.604,10.3 X2.1@50.54,10.3
SCK: DD1.13 R9.1 S1.2 | length 22.1
  Top Layer w0.15: DD1.13 30.09,6.045 32.045,6.045 ; v1(32,5.1) 32.045,5.145 32.045,6.045 ; S1.2 34,6.045 32.045,6.045 ; v1(46.4,6.8) R9.1@47.425,6.8
  Bottom Layer w0.15: v1(32,5.1) 44.7,5.1 v1(46.4,6.8)
SCSB: DD1.5 R7.1 | length 27.4
  Top Layer w0.15: v1(23.3,4.9) 24.565,4.9 DD1.5 ; v1(46.4,9.7) R7.1@47.425,9.7
  Bottom Layer w0.15: v1(23.3,4.9) 31.093,4.9 33.493,7.3 44,7.3 v1(46.4,9.7)
SDI: DD1.11 R8.1 S1.4 | length 21.4
  Top Layer w0.15: DD1.11 30.09,3.505 32.045,3.505 ; v1(32,4.3) 32.045,4.255 32.045,3.505 ; S1.4 34,3.505 32.045,3.505
  Top Layer w0.25: v1(46.4,4) R8.1@47.425,4
  Bottom Layer w0.15: v1(32,4.3) 45.978,4.3 46.278,4 v1(46.4,4)
SDO: DD1.6 R10.1 | length 26.5
  Top Layer w0.15: v1(23.3,3.6) 24.595,3.6 DD1.6 ; v1(46.4,0.9) R10.1@47.425,0.9
  Bottom Layer w0.15: v1(23.3,3.6) 43.7,3.6 v1(46.4,0.9)
SPI_LINK: DD1.8 HL2.1 | length 8.5
  Top Layer w0.15: HL2.1@16.125,1 24.545,1 DD1.8
USB_D_N: DD1.2 VD1.7 | length 8.5
  Top Layer w0.155: VD1.7@19.525,11.385 19.796,11.385 20.001,11.179 20.001,10.993 20.092,10.903 20.687,10.903 20.897,11.112 v1(21,11.112) ; v1(22.6,8.4) 22.6,8.984 22.773,9.157 23.877,9.157 23.968,9.067 23.968,8.897 24.191,8.675 DD1.2
  Bottom Layer w0.155: v1(21,11.112) 21.103,11.112 21.313,10.903 21.659,10.903 22.315,10.247 22.315,9.663 22.6,9.378 v1(22.6,8.4)
USB_D_P: DD1.1 VD1.6 | length 7.4
  Top Layer w0.155: VD1.6@19.525,10.115 19.796,10.115 20.001,10.321 20.001,10.507 20.092,10.597 20.687,10.597 20.897,10.387 v1(21,10.387) ; v1(21.8,9.2) 22.384,9.2 22.647,9.463 23.877,9.463 23.968,9.553 23.968,9.723 24.191,9.945 DD1.1
  Bottom Layer w0.155: v1(21,10.387) 21.103,10.387 21.313,10.597 21.533,10.597 22.01,10.12 22.01,9.713 21.8,9.503 v1(21.8,9.2)
pads on no net: DD1.7 DD1.9 DD1.12 DD1.14 DD1.15

## Polygon pours and split planes (outlines as drawn)
GND on Signal Layer 2 "Signal Layer 2-GND" (solid, pour order 2): -1.8,52.8 -1.8,-7.8 -1.7,-7.9 0.1,-6.1 103.7,-6.1 103.7,55.3 104.4,56
GND on Bottom Layer "Bottom Layer-No Net" (solid, pour order 6): -0.7,19.6 -1.2,19.1 -1.2,-5.3 57.8,-5.3 59.8,-3.3 59.8,21.8
+5V on Signal Layer 1 "Signal Layer 1-+5V" (solid, pour order 0): -0.7,53.3 -1.6,52.4 -1.6,-6.4 102.7,-6.4 103.7,-5.4 103.7,56.3
GND on Top Layer "Bottom Layer-No Net" (solid, pour order 10): -2.4,22 -2.9,21.5 -2.9,-2.9 56.1,-2.9 58.1,-0.9 58.1,24.2

## Silkscreen, mask and mechanical layers (free items; w line width, h text height)
Top Overlay:
  text ".designation" at 27.9,14 h1.5
  text "SPI_OUT" at 44.6,13.4 h1.5
  text "SCSB" at 56.1,9.6 h1 r90
  text "+5В" at 50,9.4 h1 r90
  text "SDI" at 56.1,7.1 h1 r90
  text "SCK" at 50.1,7 h1 r90
  text "GND" at 56.1,4.6 h1 r90
  text "SDO" at 50.1,4.1 h1 r90
Bottom Overlay:
  text ".pcb_dec_number" at 44.1,14 h1.5
Board:
  the board outline again, w0.1
Assembly Notes (Mech5):
  text "'.title'" at 1.5,-2.5 h2
  text "'.project'_'.pcb_dec_number'['.Pcb_File_Name_No_Path']" at 1.5,-5 h2